# Altium PCB testDEOP.PcbDoc
Units mm, origin at the board's own origin, x right, y up, seen from the top; angles counter-clockwise.
Board outline 40 x 40 mm, 4 copper layers (Top Layer, Middle Layer, Layer 2, Bottom Layer), stack 0.603 mm thick; 70 components, 53 nets, 248 pads, 8 vias.
Unrouted connection lines stored in the file: 174.
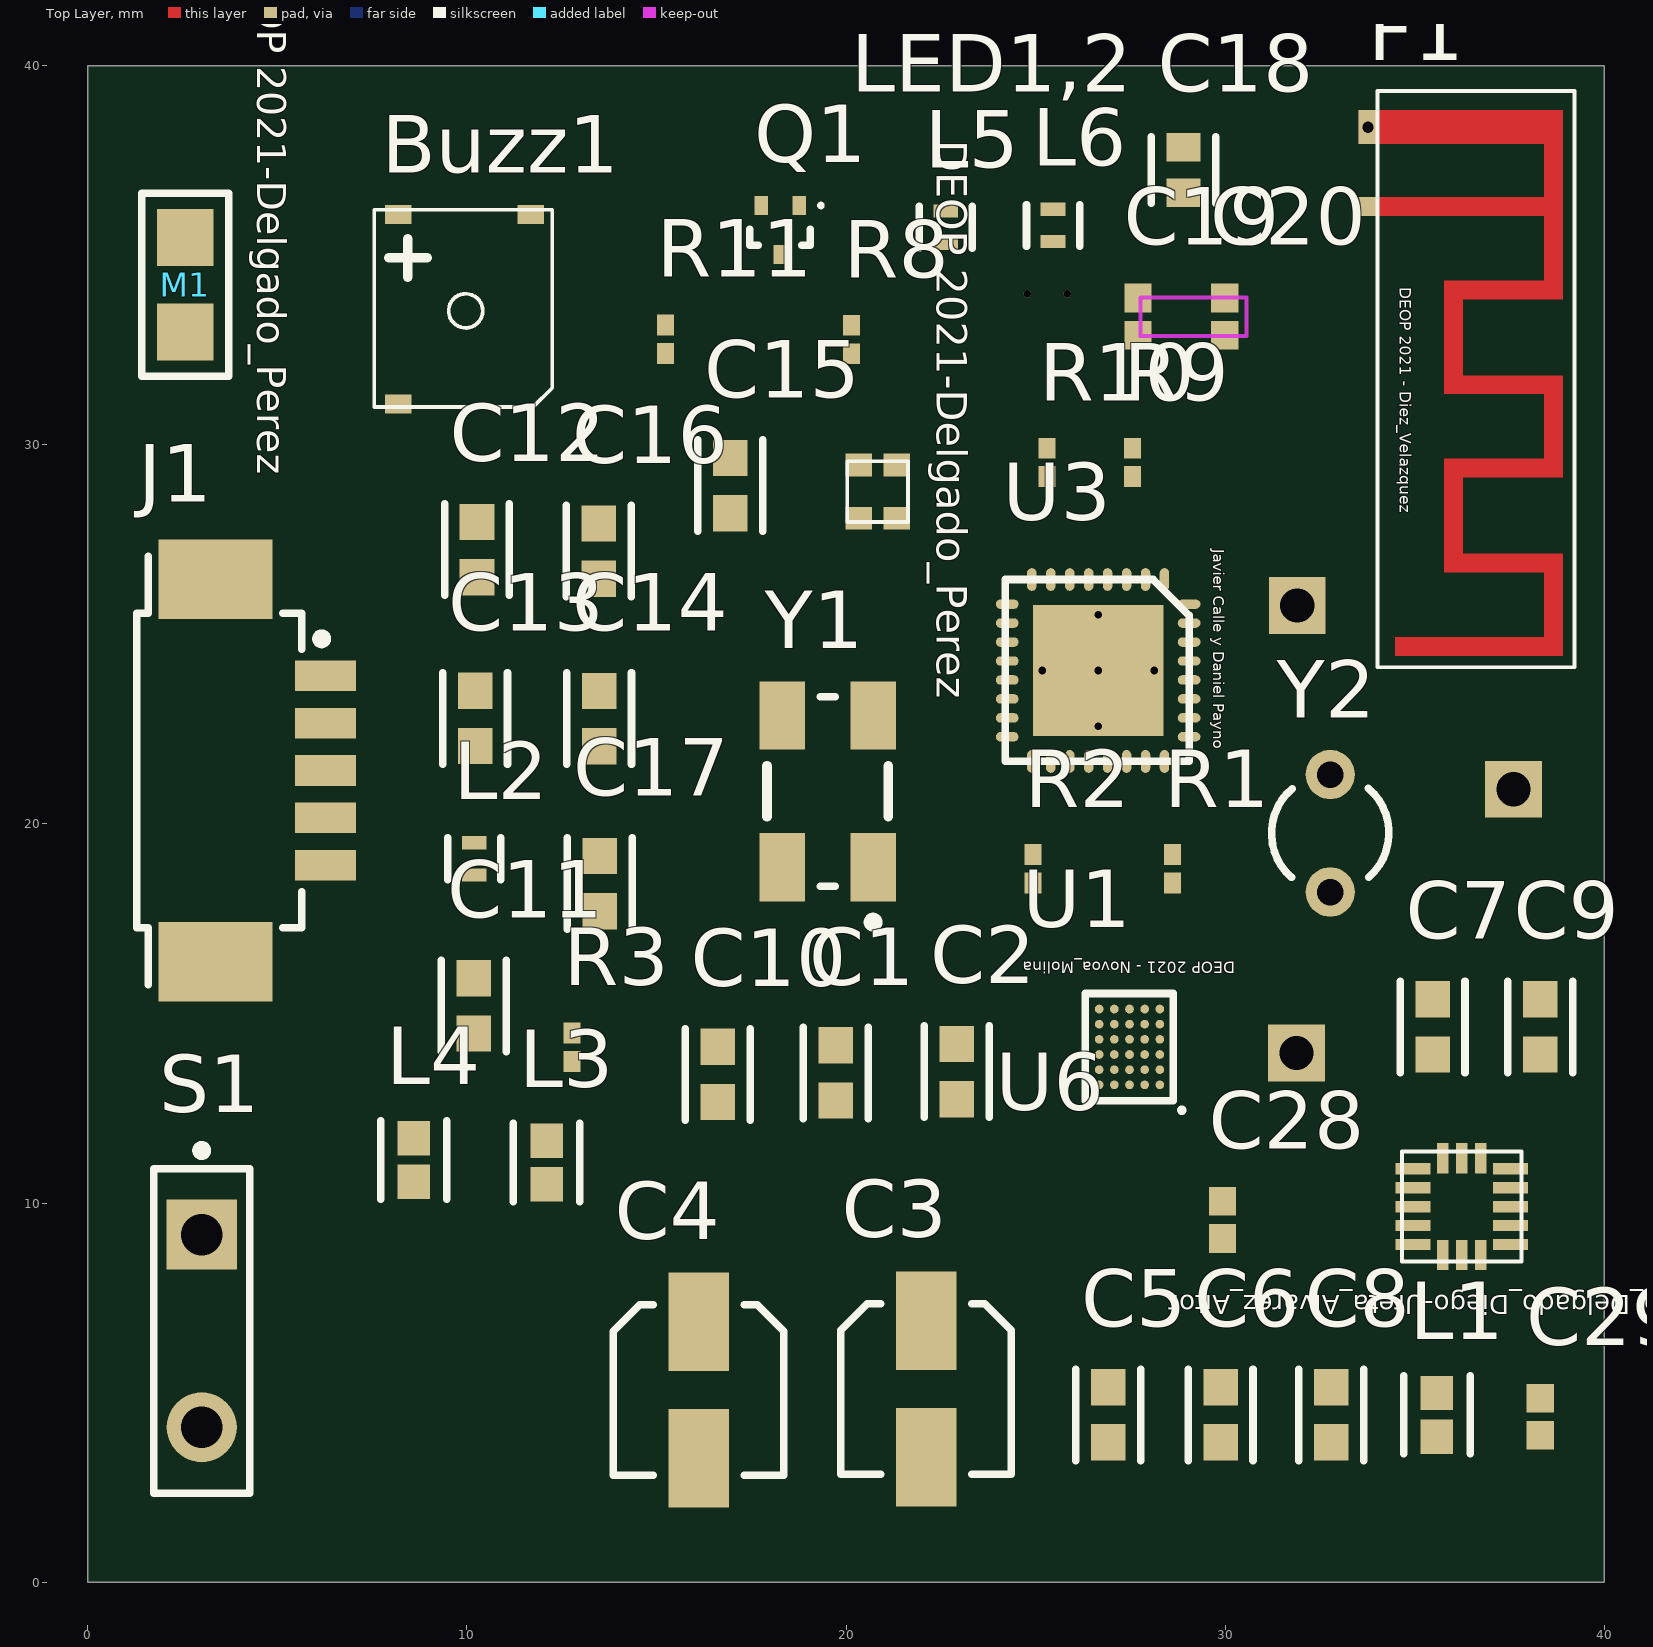
[diagram p0: Top Layer view]
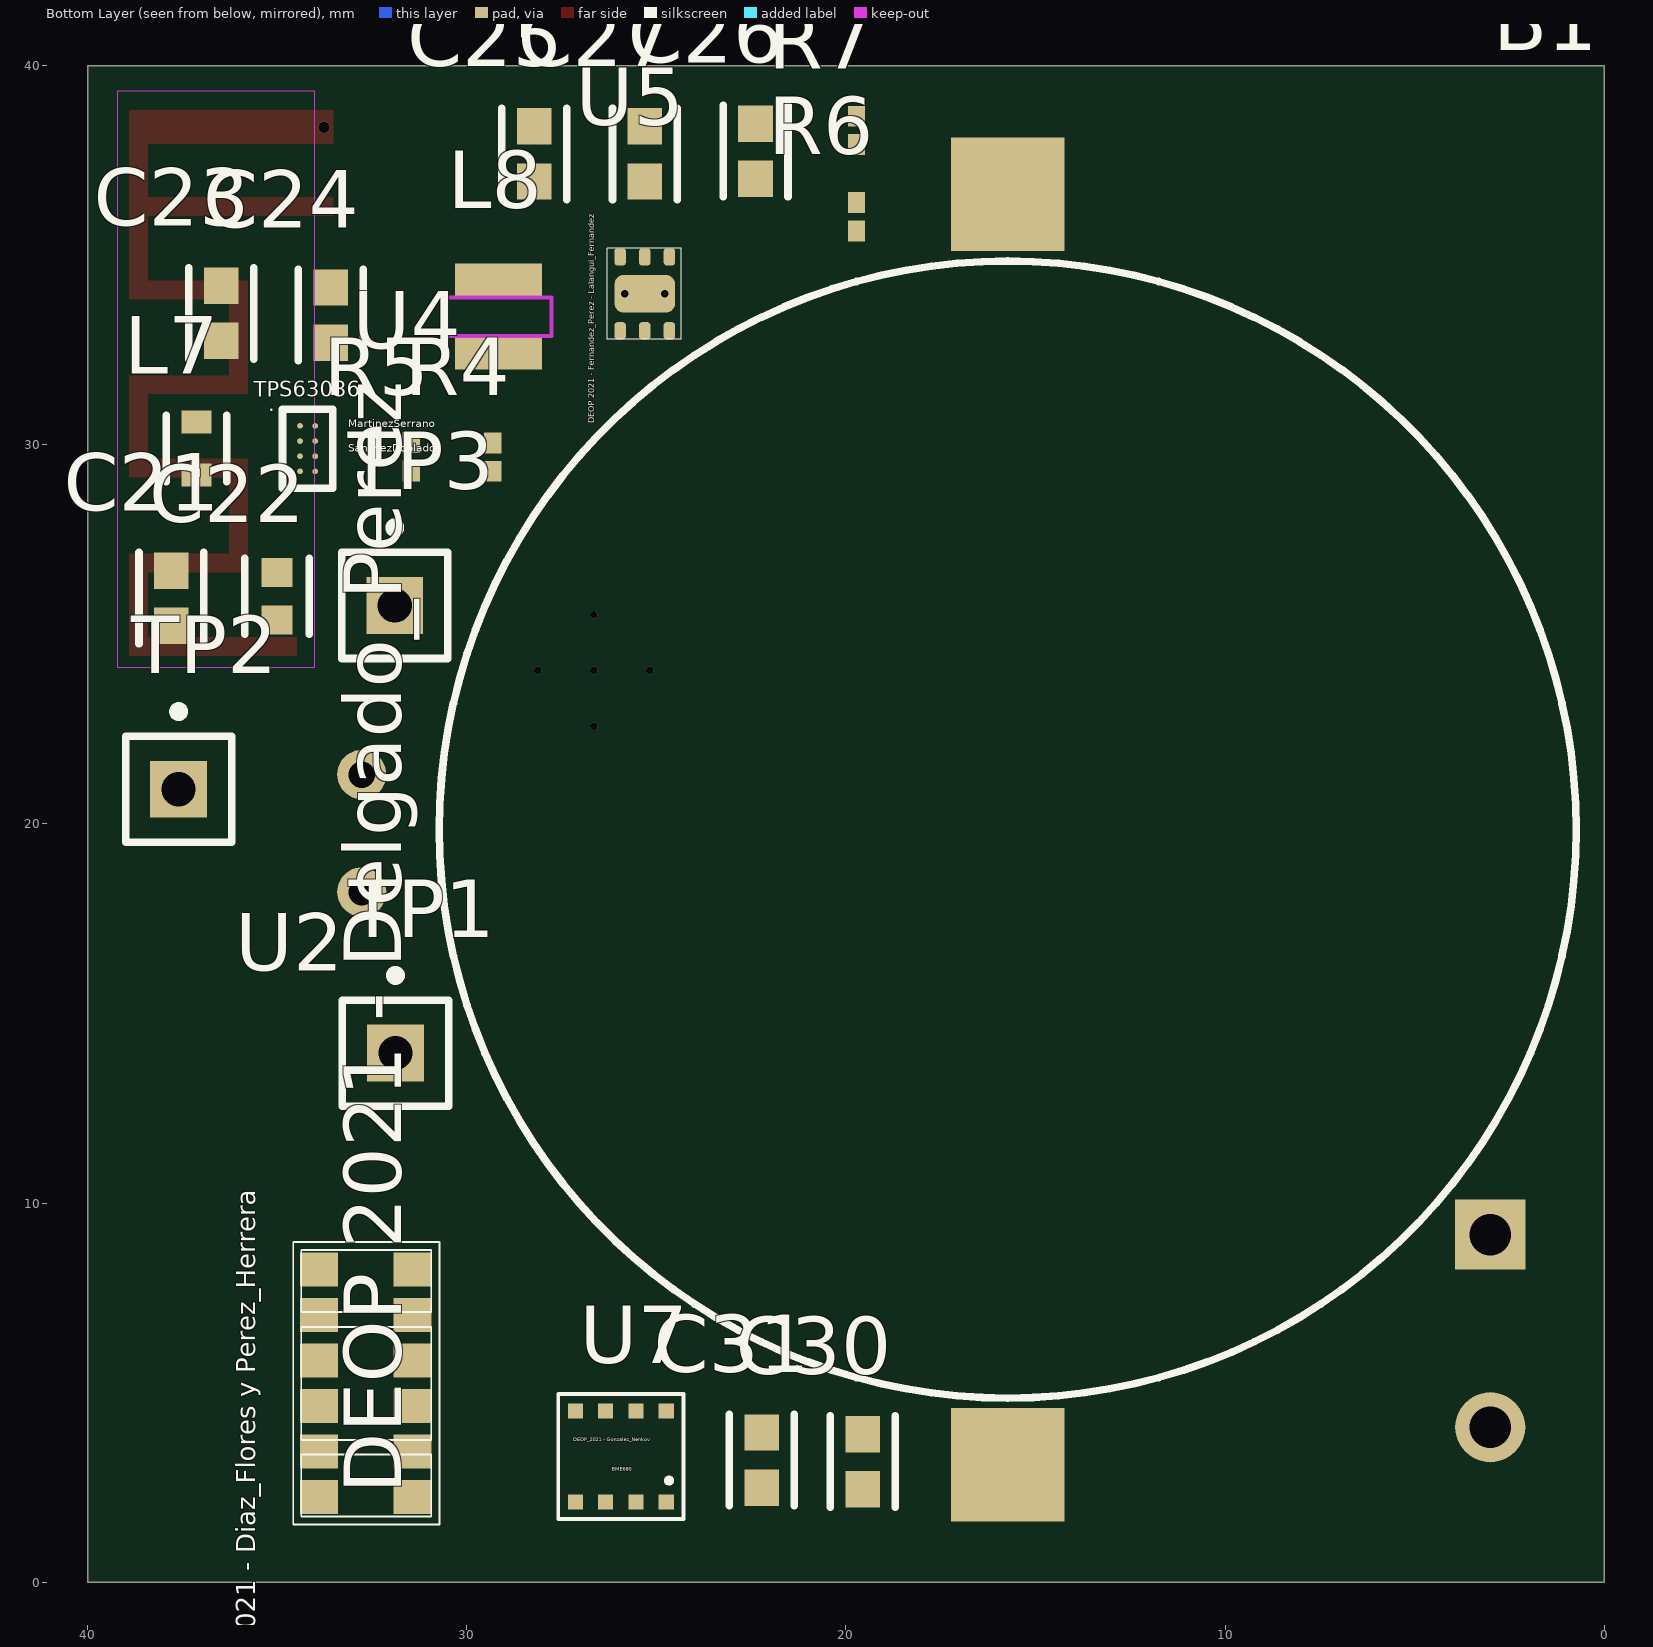
[diagram p1: Bottom Layer view, seen from below]

## Layer stack, top to bottom
Top Solder: solder mask 0.0102, Solder Resist, Dk 3.5
Top Layer: signal copper 0.0356
Dielectric 2: prepreg 0.0711, PP-006, Dk 4.6
Middle Layer: signal copper 0.035
Dielectric 1: dielectric 0.32, FR-4, Dk 4.8
Layer 2: signal copper 0.035
Dielectric 3: prepreg 0.0711, PP-006, Dk 4.6
Bottom Layer: signal copper 0.0356
Bottom Solder: solder mask 0.0102, Solder Resist, Dk 3.5

## Board outline
0,0 40,0 40,40 0,40

## Design rules (kind name [scope] priority, off if disabled: settings)
AcuteAngle [All] p1: minimum=4.50000000000000E+0001 checktracksonly=FALSE
BoardOutlineClearance [All] p1: gap=0.2 ignorepadtopadclearanceinfootprint=FALSE
Clearance [All] p1: gap=0.2 ignorepadtopadclearanceinfootprint=FALSE
HoleSize [All] p1: absolutevalues=TRUE maxlimit=6.3 minlimit=0.2 maxpercent=80.000 minpercent=20.000
HoleToHoleClearance [All] p1: gap=0.5 allowstackedmicrovias=TRUE
MinimumAnnularRing [All] p1: minimumring=0.13
PolygonConnect [All] p1: connectstyle=Relief reliefconductorwidth=0.254 reliefentries=4 polygonreliefangle="90 Angle" airgapwidth=0.254
RoutingVias [All] p1: holewidth=0.711 width=1.27 viastyle="Through Hole" minholewidth=0.711 minwidth=1.27 maxholewidth=0.711 maxwidth=1.27
SilkToSilkClearance [All] p1: silktosilkclearance=0.15
SolderMaskExpansion [All] p1: expansion=0.102 istentingtop=FALSE
UnRoutedNet [All] p1: checkbadconnections=TRUE
Width [All] p1: maxlimit=0.254 minlimit=0.254 preferedwidth=0.254
26 further rules are at their usual default settings.

## Classes and differential pairs
component class "Sensor temperatura y humedad": C30 C31 U7
component class "Sensor BIO": C1 C2 C3 C4 C5 C6 C7 C8 C9 C10 L1 R1 R2 U1 U2
component class Main: C11 C12 C13 C14 C15 C16 C17 J1 L2 L3 L4 R3 S1 TP1 TP2 TP3 U3 Y1 Y2
component class Designator: Buzz1 LED1,2 M1 Q1 R8 R9 R10 R11
component class Alimentación: B1 C21 C22 C23 C24 C25 C26 C27 L7 L8 R4 R5 R6 R7 U4 U5
component class Acelerómetro: C28 C29 U6

## Components (designator, comment, footprint, x,y, rotation, side; value= is the part's Value field where it differs from the comment)
B1 "CR3032" CR3032 15.733,19.854 r90 bottom
Buzz1 "Surface_Mount_Buzzer" buzzer 8.187,36.08 r270 top
C1 "1000pF" FP-CL10-IPC_B 19.732,13.432 r270 top
C2 "0.1µF" FP-CL10-IPC_B 22.926,13.468 r270 top
C3 "22µF" NIC-CAPA2-4X5.8_V 22.114,5.097 r270 top
C4 "22µF" NIC-CAPA2-4X5.8_V 16.113,5.066 r270 top
C5 "0.1µF" FP-CL10-IPC_B 26.92,4.413 r90 top
C6 "10µF" FP-CL10-IPC_B 29.883,4.413 r90 top
C7 "1000pF" FP-CL10-IPC_B 35.476,14.645 r270 top
C8 "0.1µF" FP-CL10-IPC_B 32.804,4.413 r90 top
C9 "0.1µF" FP-CL10-IPC_B 38.316,14.645 r270 top
C10 "0.1µF" FP-CL10-IPC_B 16.612,13.394 r270 top
C11 "0.1µF" FP-CL10-IPC_B 10.181,15.201 r90 top
C12 "10µF" FP-CL10-IPC_B 10.264,27.241 r90 top
C13 "0.1µF" FP-CL10-IPC_B 10.212,22.787 r270 top
C14 "0.1µF" FP-CL10-IPC_B 13.485,22.781 r270 top
C15 "12pF" FP-CL10-IPC_B 16.946,28.928 r90 top
C16 "12pF" FP-CL10-IPC_B 13.476,27.2 r270 top
C17 "1µF" FP-CL10-IPC_B 13.505,18.426 r90 top
C18 "12pF" FP-C0603C-CF-MFG 28.906,37.254 r90 top value="12 pF"
C19 "1.2pF" CAPC1005X55X25ML05T10 27.705,33.386 r90 top
C20 "1.2pF" CAPC1005X55X25ML05T10 29.992,33.386 r90 top
C21 "10µF" FP-CL10-IPC_B 37.799,25.957 r270 bottom
C22 "10nF" FP-CL10-IPC_C 35.015,26.01 r90 bottom
C23 "10µF" FP-CL10-IPC_B 36.482,33.474 r90 bottom
C24 "10µF" FP-CL10-IPC_B 33.595,33.429 r90 bottom
C25 "10µF" FP-CL10-IPC_B 28.222,37.681 r90 bottom
C26 "10µF" FP-CL10-IPC_B 22.387,37.751 r90 bottom
C27 "10µF" FP-CL10-IPC_B 25.305,37.681 r90 bottom
C28 "100nF" CAPC1005X55X25ML05T10 29.933,9.556 r270 top
C29 "100nF" CAPC1005X55X25ML05T10 38.317,4.361 r90 top
C30 "100nF" FP-CL10-IPC_B 19.554,3.174 r90 bottom
C31 "100nF" FP-CL10-IPC_B 22.227,3.217 r90 bottom
F1 "-" PCBAntenna 33.522,38.838 r270 top net-tie
J1 "653105131822" 653105131822 3.467,21.412 r270 top
L1 "1500Ω" FP-BLM18-0_15-t0_8-IPC_C 35.593,4.413 r270 top
L2 "10µH" FP-LQW15AN_00-W0_6-0_1-MFG 10.194,19.081 r270 top
L3 "1500Ω" FP-BLM18-0_15-t0_8-IPC_C 12.098,11.069 r270 top
L4 "1500Ω" FP-BLM18-0_15-t0_8-IPC_C 8.595,11.136 r270 top
L5 "15nH" FP-LQW15AN_00-W0_6-0_1-MFG 22.63,35.747 r90 top
L6 "2nH" FP-LQW15AN_00-W0_6-0_1-MFG 25.462,35.794 r90 top
L7 "1µH" FP-MLZ1608-MFG 37.138,29.908 r270 bottom value=1uH
L8 "2.2µH" "SMD 2508" 29.167,33.386 r270 bottom
LED1,2 "LEDs SMD" LED_SMD 21.784,29.87 r270 top
M1 "MOTOR" Motor 2.566,34.229 r270 top
Q1 "MMBT3904TT1G" ONSC-SC-75-3-463-01_V 18.26,35.673 r270 top
R1 "499Ω" RESC0603X28X15ML05T05 28.62,18.817 r90 top
R2 "499kΩ" RESC0603X28X15ML05T05 24.931,18.817 r90 top
R3 "100kΩ" RESC0603X28X15ML05T05 12.771,14.113 r270 top
R4 "51.1kΩ" RESC0603X28X15ML05T05 29.321,29.682 r270 bottom
R5 "164kΩ" RESC0603X28X15ML05T05 31.471,29.69 r90 bottom
R6 "320kΩ" RESC0603X28X15ML05T05 19.72,36.026 r270 bottom
R7 "100kΩ" RESC0603X28X15ML05T05 19.72,38.3 r270 bottom
R8 "430Ω" RESC0603X28X15ML05T05 20.149,32.784 r90 top
R9 "430Ω" RESC0603X28X15ML05T05 27.555,29.539 r270 top
R10 "430Ω" RESC0603X28X15ML05T05 25.305,29.539 r270 top
R11 "110Ω" RESC0603X28X15ML05T05 15.242,32.793 r90 top
S1 "SW-PB" SPST-2 3.001,6.624 r270 top
TP1 "Test point" PIN1 31.887,13.955 r180 bottom
TP2 "Test point" PIN1 37.608,20.916 r180 bottom
TP3 "Test point" PIN1 31.905,25.767 r180 bottom
U1 "AFE4420 - DSBGA" "AFE4420 - DSBGA" 27.48,14.118 r180 top
U2 "" SFH7072 30.754,1.539 r90 bottom
U3 "CC2640R2FRHB" DEOP2021-Calle-Payno 28.403,26.451 r270 top
U4 "TPS63036" tps63036 34.206,29.904 r180 bottom
U5 "TSP61099-WSON" SOP6 25.96,33.015 r90 bottom
U6 "ADXL362" "ADXL362 - duplicate" 36.245,9.905 r180 top
U7 "BME680_Sen_4in1" BME_LGA8 25.941,3.31 r270 bottom
Y1 "24MHz" ABRA-ABM3B-4_V 19.516,20.86 r90 top
Y2 "32.768KHz" R38 32.776,19.755 r180 top

## Footprints (in the part's own frame and the unit in brackets; to place one, negate y for a bottom-side part, rotate by r counter-clockwise, add the part's x,y. Pads: shape width x height; smd on the part's side, far side on the other; paste and mask are expansions set on the pad)
653105131822 [mm] "1.25mm SMT Male Horizontal Shrouded Header, 5p"
  rect 0.81x1.6 smd: 1(-2.5,2.8) 2(-1.25,2.8) 3(0,2.8) 4(1.25,2.8) 5(2.5,2.8)
  rect 2.1x3 smd: MP1(-5.05,-0.1) MP2(5.05,-0.1)
  silkscreen extent -5.65,-2.17 5.65,2.82, body extent -5.5,-2.1 5.5,3.3, height 3.4
ABRA-ABM3B-4_V [mm] "SMD, 4-Leads, Body 5x3.2mm"
  rect 1.8x1.2 smd: 1(-2,-1.2) 2(2,-1.2) 3(2,1.2) 4(-2,1.2)
  silkscreen extent -3.57,-1.6 2.5,1.6, body extent -2.5,-1.59 2.5,1.59, height 1.13
"ADXL362 - duplicate" [mm]
  rect 0.925x0.3 smd: 1(-1.288,1) 2(-1.288,0.5) 3(-1.288,0) 4(-1.288,-0.5) 5(-1.288,-1) 9(1.288,-1) 10(1.288,-0.5) 11(1.288,0) 12(1.288,0.5) 13(1.288,1)
  rect 0.3x0.8 smd: 6(-0.5,-1.275) 7(0,-1.275) 8(0.5,-1.275) 14(0.5,1.275) 15(0,1.275) 16(-0.5,1.275)
  silkscreen extent -1.58,-1.45 1.58,1.45, body extent -1.63,-1.5 1.63,1.5, height 1.06
"AFE4420 - DSBGA" [mm]
  round 0.23 smd paste+0 mask+0.05: A1(-0.8,1)
  round 0.23 smd mask+0.05: A2(-0.4,1) A3(0,1) A4(0.4,1) A5(0.8,1) B1(-0.8,0.6) B2(-0.4,0.6) B3(0,0.6) B4(0.4,0.6) B5(0.8,0.6) C1(-0.8,0.2) C2(-0.4,0.2) C3(0,0.2) C4(0.4,0.2) C5(0.8,0.2) D1(-0.8,-0.2) D2(-0.4,-0.2) D3(0,-0.2) D4(0.4,-0.2) D5(0.8,-0.2) E1(-0.8,-0.6) E2(-0.4,-0.6) E3(0,-0.6) E4(0.4,-0.6) E5(0.8,-0.6) F1(-0.8,-1) F2(-0.4,-1) F3(0,-1) F4(0.4,-1) F5(0.8,-1)
  silkscreen extent -1.4,-1.41 1.17,1.69, body extent -1.02,-1.28 1.04,1.29, height 0.5
BME_LGA8 [mm] "LGA, 8-Leads, Body 3,00x3,00mmx0,93mm, Pitch 0,80mm"
  rect 0.4x0.4 smd: 1(1.2,1.2) 2(1.2,0.4) 3(1.2,-0.4) 4(1.2,-1.2) 5(-1.2,-1.2) 6(-1.2,-0.4) 7(-1.2,0.4) 8(-1.2,1.2)
  silkscreen extent -1.65,-1.65 1.65,1.65, body extent -1.7,-1.7 1.7,1.7, height 1.2
buzzer [mm]
  rect 0.5x0.7 smd: 1(0,0) 2(5,0) 3(0,3.5)
  silkscreen extent -0.13,-0.64 5.08,4.06, body extent -0.13,-0.64 5.08,4.06, height 2
CAPC1005X55X25ML05T10 [mm] "Chip Capacitor, 2-Leads, Body 1.00x0.50mm, IPC Low Density"
  rect 0.76x0.72 smd: 1(-0.49,0) 2(0.49,0)
  body extent -0.53,-0.28 0.53,0.27, height 0.55
CR3032 [mm]
  rect 3x3 smd: 1(-16.764,0) 2(16.764,0)
  silkscreen extent -15,-15 15,15, body extent -15,-15 15,15, height 3.2
DEOP2021-Calle-Payno [mm]
  oval 0.6x0.25 smd mask+0.07: 1(0,0) 2(0,-0.5) 3(0,-1) 4(0,-1.5) 5(0,-2) 6(0,-2.5) 7(0,-3) 8(0,-3.5) 17(4.8,-3.5) 18(4.8,-3) 19(4.8,-2.5) 20(4.8,-2) 21(4.8,-1.5) 22(4.8,-1) 23(4.8,-0.5) 24(4.8,0)
  oval 0.25x0.6 smd mask+0.07: 9(0.65,-4.15) 10(1.15,-4.15) 11(1.65,-4.15) 12(2.15,-4.15) 13(2.65,-4.15) 14(3.15,-4.15) 15(3.65,-4.15) 16(4.15,-4.15) 25(4.15,0.65) 26(3.65,0.65) 27(3.15,0.65) 28(2.65,0.65) 29(2.15,0.65) 30(1.65,0.65) 31(1.15,0.65) 32(0.65,0.65)
  rect 3.45x3.45 smd: 33(2.4,-1.75)
  silkscreen extent 0,-4.2 4.8,0.65, body extent -0.1,-4.25 4.9,0.75, height 1
FP-BLM18-0_15-t0_8-IPC_C [mm]
  rect 0.906x0.858 smd paste+0 mask+0: 1(-0.576,0) 2(0.576,0)
  silkscreen extent -1.03,-0.87 1.03,0.87, body extent -1.13,-0.58 1.13,0.58, height 0.25
FP-C0603C-CF-MFG [mm]
  rect 0.75x0.9 smd paste+0 mask+0: 1(-0.6,0) 2(0.6,0)
  silkscreen extent -0.87,-0.85 0.88,0.85, body extent -1.2,-0.6 1.2,0.6, height 0.25
FP-CL10-IPC_B [mm]
  rect 0.958x0.912 smd paste+0 mask+0: 1(-0.727,0) 2(0.727,0)
  silkscreen extent -1.21,-0.86 1.21,0.86, body extent -1.46,-0.71 1.46,0.71, height 0.25
FP-CL10-IPC_C [mm]
  rect 0.758x0.812 smd paste+0 mask+0: 1(-0.627,0) 2(0.627,0)
  silkscreen extent -1.01,-0.85 1.01,0.85, body extent -0.8,-0.4 0.8,0.4, height 0.9
FP-LQW15AN_00-W0_6-0_1-MFG [mm]
  rect 0.35x0.65 smd paste+0 mask+0: 1(-0.425,0) 2(0.425,0)
  silkscreen extent -0.55,-0.7 0.55,0.7, body extent -0.7,-0.45 0.7,0.45, height 0.25
FP-MLZ1608-MFG [mm]
  rect 0.6x0.8 smd paste+0 mask+0: 1(-0.7,0) 2(0.7,0)
  silkscreen extent -0.87,-0.8 0.87,0.8, body extent -0.8,-0.4 0.8,0.4, height 0.95
LED_SMD [mm]
  rect 0.6x0.7 smd: 1(0.4,-1.45) 2(1.8,-1.45) 3(0.4,-0.45) 4(1.8,-0.45)
  silkscreen extent 0.3,-1.75 1.9,-0.15, body extent 0.31,-1.75 1.91,-0.15, height 0.7
Motor [mm]
  rect 1.5x1.5 smd: 1(-1.25,0) "2 +"(1.25,0)
  silkscreen extent -2.41,-1.14 2.41,1.14
NIC-CAPA2-4X5.8_V [mm] "Aluminum Electrolytic Capacitor, Diameter 4mm, Height 6.1mm, Pitch 3.6mm"
  rect 2.6x1.6 smd: 1(-1.8,0) 2(1.8,0)
  silkscreen extent -2.25,-2.25 2.25,2.25, body extent -2,-1.98 2,2, height 6.1
ONSC-SC-75-3-463-01_V [mil] "SOT23, 3-Leads, Body 1.6x0.8mm, Pitch 0.5mm"
  rect 20x14.02 smd: 1(-25.49,19.68) 2(-25.49,-19.69) 3(25.49,0)
  silkscreen extent -27,-31 16,44, body extent -16,-31 16,31, height 35
PCBAntenna [mm]
  rect 0.5x0.5 smd paste-0.25 mask+0: 1(2.55,0.25)
  rect 0.9x0.5 smd paste-0.45 mask+0: 2(0.45,0.25)
  Top Layer region: -0.001,4.899 4.999,4.899 4.999,5.399 -0.001,5.399
  Top Layer region: 4.499,2.259 4.999,2.259 4.999,4.952 4.499,4.952
  Top Layer region: 4.952,2.259 7.111,2.259 7.111,2.759 4.952,2.759
  Top Layer region: 6.999,2.259 7.499,2.259 7.499,4.952 6.999,4.952
  Top Layer region: 6.999,4.899 9.699,4.899 9.699,5.399 6.999,5.399
  Top Layer region: 9.201,2.259 9.701,2.259 9.701,4.952 9.201,4.952
  Top Layer region: 9.651,2.259 11.81,2.259 11.81,2.759 9.651,2.759
  Top Layer region: 11.701,2.259 12.201,2.259 12.201,4.952 11.701,4.952
  Top Layer region: 11.701,4.899 14.401,4.899 14.401,5.399 11.701,5.399
  Top Layer region: 13.9,0.96 14.4,0.96 14.4,4.953 13.9,4.953
  Top Layer region: 2.299,-0.001 2.799,-0.001 2.799,4.952 2.299,4.952
  Top Layer region: -0.001,-0.001 0.899,-0.001 0.899,4.952 -0.001,4.952
  Keep-Out Layer region: -0.5,0.5 -0.5,5.7 14.7,5.7 14.7,0.5
  silkscreen extent -0.5,0.5 14.7,5.7
PIN1 [mm] "Connector; Plug"
  rect 1.5x1.5 hole 0.9: 1(0,0)
  silkscreen extent -1.4,-1.4 1.4,2.17
R38 [mm] "Crystal, Thru-Hole; 2 Leads; Body 3.1 x 8.2 mm (Dia.xH)"
  round 1.3 hole 0.7: 1(0,1.55) 2(0,-1.55)
  silkscreen extent -1.55,-1.19 1.55,1.17
RESC0603X28X15ML05T05 [mm] "Chip Resistor, 2-Leads, Body 0.60x0.30mm, IPC Low Density"
  rect 0.55x0.45 smd: 1(-0.375,0) 2(0.375,0)
  body extent -0.33,-0.17 0.33,0.18, height 0.28
SFH7072 [mm]
  rect 0.9x1 smd: 1(0.705,3.155) 2(1.905,3.155) 3(3.105,3.155) 4(4.305,3.155) 5(5.505,3.155) 6(6.705,3.155) 7(6.705,0.679) 8(5.505,0.679) 9(4.305,0.679) 10(3.105,0.679) 11(1.905,0.679) 12(0.705,0.679)
  silkscreen extent -0.02,-0.03 7.44,3.83, body extent -0.01,-1.83 7.44,5.63, height 0.9
"SMD 2508" [mm] "Chip Inductor, 2-Leads, Body 2.5x2.0mm, IPC Medium Density"
  rect 0.85x2.3 smd: 1(-0.975,0) 2(0.975,0)
  Keep-Out Layer lines w0.1: 0.508,1.397 -0.508,1.397 -0.508,-1.397 0.508,-1.397 0.508,1.397
  body extent -1.25,-1 1.25,1, height 0.8
SOP6 [mm]
  rrect50% 0.45x0.3 smd mask+0.07: 1(0,0) 2(0,-0.65) 3(0,-1.3) 4(1.95,-1.3) 5(1.95,-0.65) 6(1.95,0)
  rrect50% 1x1.6 smd mask+0.07: 7(0.975,-0.65)
  silkscreen extent -0.23,-1.61 2.17,0.34, body extent -0.22,-1.61 2.17,0.34, height 0.8
SPST-2 [mm] "Switch; 2 Leads"
  rect 1.85x1.85 hole 1.1: 1(-2.54,0)
  round 1.85 hole 1.1: 2(2.54,0)
  silkscreen extent -4.89,-1.27 4.28,1.27
tps63036 [mm]
  round 0.15 smd: A1(-0.2,0.6) A2(0.2,0.6) B1(-0.2,0.2) B2(0.2,0.2) C1(-0.2,-0.2) C2(0.2,-0.2) D1(-0.2,-0.6) D2(0.2,-0.6)
  silkscreen extent -0.66,-1.04 0.66,1.04, body extent -0.54,-0.91 0.54,0.9, height 0.63

## Part data
C1 C2 C5 C6 C7 C8 C9 C10 C11 C12 C13 C14 C15 C16 C17 C21 C23 C24 C25 C26 C27 C30 C31: library part CMP-13271-003245-1, "Cap Ceramic 10uF 10V X5R ±10% Pad SMD 0603 +85°C T/R", Capacitance=10uF, Case/Package=0603, Dielectric=X5R, Max Operating Temperature=85°C, Min Operating Temperature=-55°C, Package Quantity=10000, Tolerance=10%, Voltage Rating=10V, Depth=0.8mm, Height=0.8mm, Lead Free="Lead Free", Length=1.6mm, Mount="Surface Mount", Packaging="Tape and Reel", Radiation Hardening=No, Thickness=0.035inch, Voltage Rating (DC)=10V, Width=0.031inch
C3 C4: library part CMP-0687-00010-1, "Aluminum Electrolytic Capacitor, UD Series, Low Impedance, 22 uF, 10 V, + / - 20%, -55 to 105 degC, Chip Type, 4 x 5.8 mm D x L, Pb-Free, Reel", Manufacturer=Nichicon, PartNumber=UUD1A220MCL1GS, Rated Capacitance="22 uF", Rated Ripple Current (at 100kHz)="80 mA", Rated Voltage="10 V", Tolerance Rated Capacitance="-20 to 20%", ComponentLink1Description="Manufacturer URL", ComponentLink1URL=http://www.nichicon.co.jp/, ComponentLink2Description=Datasheet, ComponentLink2URL=http://products.nichicon.co.jp/en/pdf/XJA043/e-ud.pdf, ComponentLink3Description="Package Specification", ComponentLink3URL=http://products.nichicon.co.jp/en/pdf/XJA043/e-ud.pdf, DatasheetVersion=08/2012, Diameter="4 mm", Endurance Time="2000 h", Impedance="1.8 Ohm", Length="5.8 mm", Mounting Technology="Surface Mount", PackageDescription="2-Pin Surface Mount Device, Diameter 4 mm, Height 5.8 mm, Pitch 3.6 mm", PackageReference=CAPAE-D4H5.8, Packing="Dia382mm Reel", RoHS=TRUE
C18: library part CMP-1035-00616-2, "CAP CER 12PF 50V NP0 0603", Capacitance="12 pF", Manufacturer=KEMET, Manufacturer Part Number=C0603C120D5GACTU, Package=C0603C-CF, Temperature="-55°C to +125°C", Temperature Characteristic=C0G, Temperature Coefficient=30ppm/°C, Temperature Range High=+125°C, Temperature Range Low=-55°C, Tolerance="0.5 pF", Voltage Rating="50 V", Automotive=Yes, Automotive Grade="Grade 1", Category=Cap, ComponentLink2Description=Datasheet, ComponentLink2URL=https://api.kemet.com/component-edge/download/datasheet/C0603C100J5GACAUTO.pdf, Device Class L1="Passive Components", Device Class L2=Capacitors, Device Class L3="Ceramic Capacitors", Digikey Description="CAP CER 12PF 50V NP0 0603", Height=0.87mm, Lead Free=Yes, Material=Ceramic, Mouser Description="Multilayer Ceramic Capacitors MLCC - SMD/SMT 50volts 12pF C0G 0.5%", Octopart=https://octopart.com/c0603c120d5gactu-kemet-9143898, RoHS=TRUE
C19 C20 C28 C29: library part CMP-2008-04279-1, Manufacturer=Murata, Part Number=GRM1555C1H1R2BA01D
C22: library part CMP-13271-000193-1, "Cap Ceramic 10nF 50V X7R ±20% Pad SMD 0603 +125°C T/R", Case Code (Imperial)=0603, Case Code (Metric)=1608, Dielectric=X7R, Max Operating Temperature=125°C, Min Operating Temperature=-55°C, Package Quantity=4000, Tolerance=20%, Voltage Rating=50V, Capacitance=10nF, Case/Package=0603, Depth=0.8mm, Height=0.8mm, Lead Free="Lead Free", Length=1.6mm, Mount="Surface Mount", Packaging="Tape and Reel", Radiation Hardening=No, Thickness=0.035inch, Voltage Rating (DC)=50V, Width=0.031inch
F1: library part PCBAntenna, "GND pin has a via to a GND plane that is not included in the footprint, but has to be included in the final PCB layout design."
J1: library part CMP-1502-00774-1, "Male Shrouded Header WR-WTB, SMT, Right Angled, pitch 1.25 mm, 1 x 5 position", Contact Resistance=20mOhm, Manufacturer="Wurth Elektronik", Operating Temperature=-40to85degC, Working Voltage=125VAC, Datasheet URL=https://katalog.we-online.de/em/datasheet/6531xx131822.pdf, Gender=Male, Manufacturer URL=http://www.we-online.de, Mounting Technology=SMT, Orientation=RightAngled, Package Reference=653105131822, Packaging=TapeandReel, Part Number=653105131822, Pitch=1.25mm, Position=1x5, Publisher=WurthElektronik
L1 L3 L4: library part CMP-0686-00368-3, "Chip Ferrite Bead, 0603, 1500Ω @ 100MHz, 0.5Ω, 25%, 500mA", Case Code (Imperial)=0603, Case Code (Metric)=1608, Current Rating=500mA, DC Resistance (DCR)=500mR, Max Operating Temperature=125°C, Min Operating Temperature=-55°C, Package Quantity=1, Test Frequency=100MHz, Tolerance=25%, Case/Package=0603, Core Material=Ferrite, DC Current=500mA, Depth=0.8mm, Height=0.8mm, Impedance=1.5kR, Lead Free="Lead Free", Length=1.6mm, Material=Ferrite, Max Current Rating=500mA, Max DC Current=500mA, Military Standard=Not, Number of Circuits=1, Number of Lines=1, Number of Pins=2, Packaging="Tape and Reel", Radiation Hardening=No, REACH SVHC="No SVHC", Termination=SMD/SMT, Width=0.8mm
L2: library part CMP-2000-06595-2, "Wire Wound RF Inductor 15nH ±5% 460mA 0.16Ω 0402 (1005)", Case Code (Imperial)=0402, Case Code (Metric)=1005, Current Rating=460mA, DC Resistance (DCR)=160mR, Inductance=15nH, Max Operating Temperature=125°C, Min Operating Temperature=-55°C, Package Quantity=10000, Resistor Type=Wirewound, Self Resonant Frequency=5GHz, Test Frequency=100MHz, Tolerance=5%, Case/Package=0402, Core Material=Air, DC Current=460mA, Depth=0.7mm, Height=0.5mm, Lead Free="Lead Free", Length=1mm, Max DC Current=460mA, Military Standard=Not, Mount="Surface Mount", Packaging="Tape and Reel", Q Factor=30, Radiation Hardening=No, Shielding=Unshielded, Termination=SMD/SMT, Weight=2.8E-05oz, Width=0.02inch
L5: library part CMP-2000-06595-2, "Wire Wound RF Inductor 15nH ±5% 460mA 0.16Ω 0402 (1005)", Case Code (Imperial)=0402, Case Code (Metric)=1005, Current Rating=460mA, DC Resistance (DCR)=160mR, Max Operating Temperature=125°C, Min Operating Temperature=-55°C, Package Quantity=10000, Resistor Type=Wirewound, Self Resonant Frequency=5GHz, Test Frequency=100MHz, Tolerance=5%, Case/Package=0402, Core Material=Air, DC Current=460mA, Depth=0.7mm, Height=0.5mm, Inductance=15nH, Lead Free="Lead Free", Length=1mm, Max DC Current=460mA, Military Standard=Not, Mount="Surface Mount", Packaging="Tape and Reel", Q Factor=30, Radiation Hardening=No, Shielding=Unshielded, Termination=SMD/SMT, Weight=2.8E-05oz, Width=0.02inch
L6: library part CMP-06042-008059-1, "Wire Wound RF Inductor 2.4nH ±0.1nH 850mA 0.05Ω 0402 (1005)", Case Code (Imperial)=0402, Case Code (Metric)=1005, Current=260mA, Current Rating=850mA, DC Resistance (DCR)=50mR, Inductance=2.4nH, Max Operating Temperature=125°C, Min Operating Temperature=-55°C, Package Quantity=10000, Resistor Type=Wirewound, Self Resonant Frequency=15GHz, Test Frequency=100MHz, Tolerance=2%, Case/Package=0402, Core Material=Air, DC Current=850mA, Depth=0.7mm, Height=0.5mm, Lead Free="Lead Free", Length=1mm, Max DC Current=850mA, Military Standard=Not, Mount="Surface Mount", Packaging="Tape and Reel", Q Factor=20, Radiation Hardening=No, REACH SVHC="No SVHC", Shielding=Unshielded, Termination=SMD/SMT, Weight=2.8E-05oz, Width=0.02inch
L7: library part CMP-08253-000001-1, "FIXED IND 1UH 600MA 150 MOHM SMD", Inductance=1uH, Manufacturer=TDK, Manufacturer Part Number=MLZ1608A1R0WT000, Package=MLZ1608, Saturation Current=190mA, Series Resistance=0.195Ω, Temperature="-55°C to +125°C", Temperature Range High=+125°C, Temperature Range Low=-55°C, Test Frequency=10MHz, Tolerance=20%, Automotive=No, Category=Ind, ComponentLink2Description=Datasheet, ComponentLink2URL=https://product.tdk.com/info/en/catalog/datasheets/inductor_commercial_decoupling_mlz1608_en.pdf, Composition=Multilayer, Core Material=Ferrite, Device Class L1="Passive Components", Device Class L2=Inductors, Device Class L3="Fixed Inductors", Digikey Description="FIXED IND 1UH 600MA 150 MOHM SMD", Height=0.95mm, Ipc Land Pattern Name=CAPC16080X80, Lead Free=Yes, Mouser Description="Inductor Power Shielded Multi-Layer 1uH 20% 10MHz Ferrite 0.19A 0.195Ohm DCR 0603 T/R", Octopart=https://octopart.com/mlz1608a1r0wt000-tdk-34829250, RoHS=TRUE, Shielding=true
L8: library part CMP-1411-00004-1, "Power Multilayer Inductor WE-MAPI, L=2.2µH", Inductance=2.2ÂµH, Manufacturer="Wuerth Elektronik", PartNumber=74438322022, ComponentLink1Description="Manufacturer URL", ComponentLink1URL=http://www.we-online.com, ComponentLink2Description=Datasheet, ComponentLink2URL=http://katalog.we-online.de/kataloge/eisos/media/pdf/74438322022.pdf, PackageReference="SMD 2508"
LED1,2: library part LED
Q1: library part CMP-1048-00420-1, "General Purpose Transistor, NPN Silicon, 3-Pin SC-75, Pb-Free, Tape and Reel", Manufacturer="On Semiconductor", ComponentLink1Description="Manufacturer URL", ComponentLink1URL=http://www.onsemi.com/, ComponentLink2Description=Datasheet, ComponentLink2URL=http://www.onsemi.cn/pub_link/Collateral/MMBT3904TT1-D.PDF, ComponentLink3Description="Package Specification", ComponentLink3URL=http://www.onsemi.com/pub_link/Collateral/463-01.PDF, DatasheetVersion="Rev. 5", fT Min (MHz)=300, IC Continuous (A)=0.2, Mounting Technology="Surface Mount", PackageDescription="3-Pin Small Outline Transistor, Body 1.6 x 0.8 mm, Pitch 0.5 mm", PackageReference=SC-75-3-463-01, PackageVersion="Rev. F, 07/2005", Packing="Tape and Reel", PartNumber=MMBT3904TT1G, Polarity=NPN, RoHS=TRUE
R1 R2 R3 R4 R5 R6 R7 R8 R9 R10 R11: library part CMP-2004-00291-1, Manufacturer="Vishay Dale", Part Number=CRCW020120K0JNED
S1: "Switch", LatestRevisionDate=17-Jul-2002, LatestRevisionNote="Re-released for DXP Platform.", PackageDescription="Switch; 2 Leads", PackageReference=SPST-2, Published=24-Mar-1999, Publisher="Altium Limited"
TP1 TP2 TP3: library part Socket, "Socket", LatestRevisionDate=17-Jul-2002, LatestRevisionNote="Re-released for DXP Platform.", Publisher="Altium Limited"
U2: library part SFH7072, "Sensor biométrico"
U4: "Non-inverting buck-boost / converter able to provide a regulated output voltage / from an input supply that can be higher or lower than / the output voltage"
Y1: library part CMP-1688-00008-1, "Ceramic SMD Crystal, 24 MHz, +/- 20 ppm, 50 Ohm, -20 to 70 degC, 4-Pin SMD, RoHS, Tape and Reel", Frequency="6 Hz", Max Operating Temperature="155 degC", Min Operating Temperature="-40 degC", Package Quantity=2500, ComponentLink1Description="Manufacturer URL", ComponentLink1URL=http://www.abracon.com/, ComponentLink2Description=Datasheet, ComponentLink2URL=http://www.abracon.com/Resonators/abm3b.pdf, Contact Material=Brass, Contact Plating=Gold, DatasheetVersion=Aug-15, Fastening Type=Snap, Height="1.244 mm", Impedance="50 Ohm", Length="2.6 mm", Mating Cycles=30, Mount="Surface Mount", PackageDescription="4-Pin Surface Mount Device, Body 5 x 3.2 mm", PackageReference=ABM3B, Packaging="Tape and Reel", Radiation Hardening=No, REACH SVHC=Unknown, RoHSCompliant=true, Weight="0.001058 oz", Width="3 mm"
Y2: library part XTAL, "Crystal Oscillator", LatestRevisionDate=17-Jul-2002, LatestRevisionNote="Re-released for DXP Platform.", PackageDescription="Crystal, Thru-Hole; 2 Leads; Body 3.1 x 8.2 mm (Dia.xH)", PackageReference=R38, Published=8-Jun-2000, Publisher="Altium Limited"

## Via types
v1: diameter 0.2, hole 0.2, Top Layer to Bottom Layer, 7 vias
v2: diameter 0.3, hole 0.3, Top Layer to Bottom Layer, 1 vias

## Nets (pads, with @x,y where several pads share a name; then routed paths per layer and width w, separated by ;. In a path a pad name is that pad's centre, name@x,y a point inside that pad or via, vN(x,y) a via of type N, cw(c..) or ccw(c..) an arc to the next point about the centre after c; other vN are vias at no path point)
CC_RESET: C11.1 J1.4 R3.1 S1.1 U3.19
GND: B1.2 Buzz1.2 C1.2 C2.2 C3.2 C4.2 C5.2 C6.2 C7.2 C8.2 C9.2 C10.2 C21.2 C23.2 C24.2 C25.2 C26.2 C27.2 C28.1 C29.1 C30.2 C31.2 L3.1 L4.1 LED1,2.1 LED1,2.3 Q1.2 R2.1 R4.1 R7.1 U1.B4 U1.D1 U1.D5 U4.B2 U4.C2 U5.6 U5.7 U6.12 U6.13 U6.16 U7.1 U7.5 U7.7
  other v1: 24.785,33.99 25.835,33.99
GND1: C11.2 C12.2 C13.2 C14.2 C15.1 C16.1 C17.2 C19.1 C20.1 F1.1 J1.1 L3.2 L4.2 S1.2 U3.3 U3.33 Y1.2 Y1.4
  other v1: 26.653,22.576 25.178,24.051 26.653,24.051 28.128,24.051 26.653,25.526
IN2_N: U1.B3 U2.10
IN2_P: U1.B2 U2.3
IN_N: U2.2
IN_P: U1.A2 U2.1
JTAG_TCKC: J1.2 U3.14
JTAG_TMSC: J1.3 U3.13
NetBuzz1_3: Buzz1.3 R11.2
NetC10_1: C10.1 U1.D2
NetC15_2: C15.2 U3.4 Y2.1
NetC16_2: C16.2 TP3.1 U3.5 Y2.2
NetC17_1: C17.1 U3.12
NetC18_1: C18.1 C19.2 L6.2
NetC18_2: C18.2 F1.2
NetC20_2: C20.2 L5.2 L6.1 U3.1
NetL2_2: L2.2 U3.17
NetL5_1: L5.1 U3.2
NetL7_1: L7.1 U4.B1
NetL7_2: L7.2 U4.C1
NetL8_2: L8.2 U5.2
NetLED1,2_2: LED1,2.2 R10.2
NetLED1,2_4: LED1,2.4 R9.2
"NetM1_2 +": "M1.2 +" Q1.3
NetQ1_1: Q1.1 R8.2
NetR1_1: R1.1 R2.2 U1.F1
NetR1_2: R1.2 U3.26
NetR4_2: R4.2 R5.1 U4.D2
NetR6_1: R6.1 R7.2 U5.4
NetR8_1: R8.1 U3.15
NetR9_1: R9.1 U3.20
NetR10_1: R10.1 U3.16
NetR11_1: R11.1 U3.10
NetTP1_1: TP1.1 U3.23
NetTP2_1: TP2.1 U3.31 Y1.3
NetU1_E1: U1.E1 U3.27
NetU1_E2: U1.E2 U3.22 U6.7
NetU1_E3: U1.E3 U3.8
NetU1_F2: U1.F2 U3.21 U6.6
NetU1_F3: U1.F3 U3.25 U6.4
NetU1_F4: U1.F4 U3.9
NetU3_6: U3.6 U7.4
NetU3_7: U3.7 U7.2
NetU3_24: U3.24 U6.8
NetU3_30: U3.30 Y1.1
TX2: U1.E5 U2.6
TX3: U1.E4 U2.8
TX4: U2.9
TX_SUP: C1.1 C2.1 C3.1 C4.1 C26.1 C27.1 J1.5 R3.2 R6.2 U1.F5 U2.4 U2.5 U2.7 U3.18 U3.28 U5.5
V2V1: C22.1 C22.2 C23.1 C24.1 C28.2 C29.2 C30.1 C31.1 L1.1 R5.2 U4.D1 U6.1 U6.14 U7.3 U7.6 U7.8
V2V1_filt: C5.1 C6.1 C7.1 C8.1 C12.1 C13.1 C14.1 L1.2 L2.1 U1.A4 U1.C1 U3.29 U3.32
VBAT: B1.1 Buzz1.1 C9.1 C21.1 C25.1 L8.1 M1.1 U1.C4 U3.11 U4.A1 U4.A2 U5.1 U5.3
pads on no net: J1.MP1 J1.MP2 U1.A1 U1.A3 U1.A5 U1.B1 U1.B5 U1.C2 U1.C3 U1.C5 U1.D3 U1.D4 U2.11 U2.12 U6.2 U6.3 U6.5 U6.9 U6.10 U6.11 U6.15
copper on no net:
  other v2: 33.772,38.388

## Text inside footprints (layer, text, board x,y; h text height)
B1: Bottom Overlay "DEOP 2021 - Delgado_Perez" at 31.735,2.328 h1.52 r270
F1: Top Overlay "DEOP 2021 - Diez_Velazquez" at 34.611,34.166 h0.3 r270
LED1,2: Top Overlay "DEOP 2021-Delgado_Perez" at 22.394,38.04 h0.8 r270
M1: Top Overlay "DEOP 2021-Delgado_Perez" at 4.471,43.246 h0.76 r270
U1: Top Overlay "DEOP 2021 - Novoa_Molina" at 30.27,16.368 h0.3 r180
U2: Bottom Overlay "DEOP 2021 - Diaz_Flores y Perez_Herrera" at 35.593,-3.822 h0.5 r270
U3: Top Overlay "Javier Calle y Daniel Payno" at 29.59,27.251 h0.5 r270
U4: Bottom Overlay "SanchezDoblado" at 33.14,29.827 h0.2; Bottom Overlay "MartinezSerrano" at 33.14,30.462 h0.2
U5: Bottom Overlay "DEOP 2021 - Fernandez_Perez - Lalangui_Fernandez" at 26.64,30.57 h0.15 r270
U6: Top Overlay "DEOP2021-Lara_Delgado_Diego-Ureta_Alvarez_Aitor" at 46.445,7.564 h0.5 r180
U7: Bottom Overlay "DEOP_2021 - Gonzalez_Nenkov" at 27.201,3.717 h0.1; Bottom Overlay "BME680" at 26.185,2.939 h0.1